# Altium PCB WalkMod.PcbDoc
Units mm, origin at the board's own origin, x right, y up, seen from the top; angles counter-clockwise.
Board outline 13 x 10 mm, 2 copper layers (Top Layer, Bottom Layer); 18 components, 12 nets, 33 pads, 0 vias.
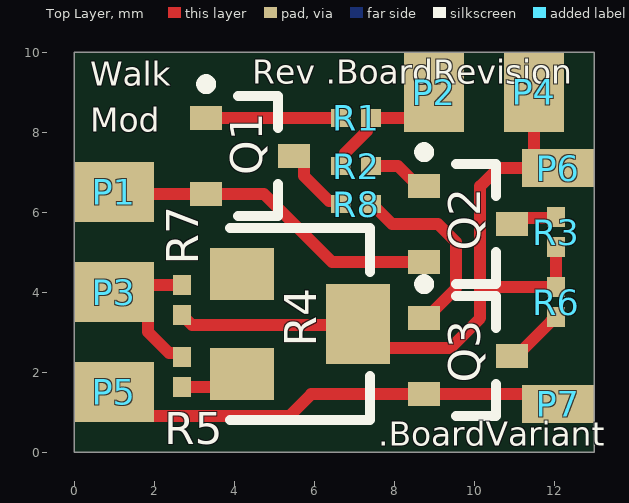
[diagram p0: Top Layer view]
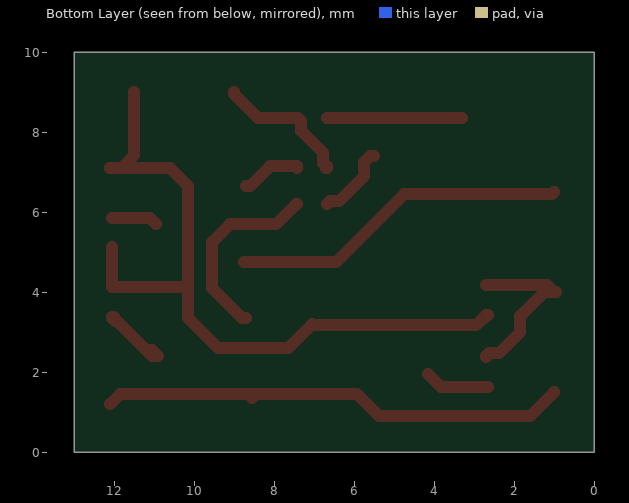
[diagram p1: Bottom Layer view, seen from below]

## Layer stack, top to bottom
Top Solder: solder mask 0.0102, Solder Resist, Dk 3.5
Top Layer: signal copper 0.0356
Dielectric 1: dielectric 0.32, FR-4, Dk 4.8
Bottom Layer: signal copper 0.0356
Bottom Solder: solder mask 0.0102, Solder Resist, Dk 3.5

## Board outline
0,0 0,10 13,10 13,0

## Design rules (kind name [scope] priority, off if disabled: settings)
BoardOutlineClearance [All] p1 off: gap=0.7 ignorepadtopadclearanceinfootprint=FALSE
Clearance [All] p1: gap=0.2 ignorepadtopadclearanceinfootprint=FALSE
Height [All] p1 off: minheight=0 maxheight=25.4 prefheight=12.7
HoleSize [All] p1: absolutevalues=TRUE maxlimit=0.3 minlimit=0.3 maxpercent=80.000 minpercent=20.000
HoleToHoleClearance [All] p1: gap=0.5 allowstackedmicrovias=TRUE
MinimumSolderMaskSliver [All] p1: minsoldermaskwidth=0.2
PolygonConnect [All] p1: connectstyle=Relief reliefconductorwidth=0.254 reliefentries=4 polygonreliefangle="90 Angle" airgapwidth=0.254
RoomDefinition WalkMod [InComponentClass('WalkMod')] p1 off: confinementstyle=ConfineIn formatcopy=TRUE lockcomponents=FALSE outline 0.3,10.8 1.4,10.8 1.4,11.9 0.3,11.9
RoutingVias [All] p1: holewidth=0.3 width=0.6 viastyle="Through Hole" minholewidth=0.3 minwidth=0.6 maxholewidth=0.3 maxwidth=0.6
SilkToSolderMaskClearance [IsPad] p1 off: minsilkscreentomaskgap=0.254 clearancetoexposedcopper=TRUE
SolderMaskExpansion [All] p1: expansion=0.102 istentingtop=FALSE
Width [All] p1: maxlimit=0.7 minlimit=0.3 preferedwidth=0.3
25 further rules are at their usual default settings.

## Components (designator, comment, footprint, x,y, rotation, side; value= is the part's Value field where it differs from the comment)
P1 "SMD Pad 1 pin" PAD_2X1.5_SQUARE 1,6.5 r180 top
P2 "SMD Pad 1 pin" PAD_2X1.5_SQUARE 9,9 r270 top
P3 "SMD Pad 1 pin" PAD_2X1.5_SQUARE 1,4 r180 top
P4 "SMD Pad 1 pin" PAD_2X1.5_SQUARE 11.5,9 r270 top
P5 "SMD Pad 1 pin" PAD_2X1.5_SQUARE 1,1.5 r0 top
P6 "SMD Pad 1 pin" PAD_1.8X0.95_SQUARE 12.1,7.1 r180 top
P7 "SMD Pad 1 pin" PAD_1.8X0.95_SQUARE 12.1,1.2 r180 top
Q1 "BC857B-TP" BC8xx_SOT23-3_C 4.4,7.4 r0 top
Q2 "BC857B-TP" BC8xx_SOT23-3_C 9.85,5.7 r0 top
Q3 "BC847B-TP" BC8xx_SOT23-3_C 9.85,2.4 r0 top
R1 "RT0402DRD0747KL" RT0402 7.05,8.35 r180 top value=47k
R2 "RT0402DRD0747KL" RT0402 7.05,7.15 r0 top value=47k
R3 "AT0402FRE0710KL" AT0402 12.05,5.5 r270 top value=10k
R4 "3214W-1-103E" BOURNS_3214W_C 5.65,3.2 r180 top value=10k
R5 "RT0402FRE074K7L" RT0402 2.7,2 r270 top value=4.7k
R6 "AT0402FRE0710KL" AT0402 12.05,3.75 r270 top value=10k
R7 "AT0402FRE0710KL" AT0402 2.7,3.8 r90 top value=10k
R8 "RT0402DRD0747KL" RT0402 7.05,6.2 r0 top value=47k

## Footprints (in the part's own frame and the unit in brackets; to place one, negate y for a bottom-side part, rotate by r counter-clockwise, add the part's x,y. Pads: shape width x height; smd on the part's side, far side on the other; paste and mask are expansions set on the pad)
AT0402 [mm] "Chip Resistor, 2-Leads, Body 1.00x0.50mm, IPC High Density"
  rect 0.5x0.45 smd mask+0.13: 1(-0.375,0) 2(0.375,0)
  body extent -0.53,-0.27 0.53,0.28, height 0.4
BC8xx_SOT23-3_C [mm] "SOT23, 3-Leads, Body 2.92x2.37mm, Pitch 0.95mm, IPC High Density"
  rect 0.8x0.6 smd: B(-1.1,0.95) C(1.1,0) E(-1.1,-0.95)
  silkscreen extent -1.22,-1.5 0.7,1.92, body extent -0.7,-1.52 0.7,1.52, height 1.1
BOURNS_3214W_C [mm]
  rect 1.6x1.3 smd: 1(1.45,-1.25) 3(1.45,1.25)
  rect 1.6x2 smd: 2(-1.45,0)
  silkscreen extent -1.75,-2.4 1.75,2.4, body extent -1.98,-2.41 1.98,2.42, height 5.29
PAD_1.8X0.95_SQUARE [mm]
  rect 1.8x0.95 smd paste-5: 1(0,0)
PAD_2X1.5_SQUARE [mm]
  rect 2x1.5 smd paste-5: 1(0,0)
RT0402 [mm] "Chip Resistor, 2-Leads, Body 1.00x0.50mm, IPC High Density"
  rect 0.5x0.45 smd mask+0.13: 1(-0.375,0) 2(0.375,0)
  body extent -0.53,-0.27 0.53,0.28, height 0.4

## Part data
P1 P2 P3 P4 P5 P6 P7: "Single SMD Pad"
  P1: Name=3.3V
  P2: Name=Button
  P3: Name="X Axis In"
  P4: Name="X Axis Out"
  P5: Name=GND
  P6: Name=Snapback+
  P7: Name=Snapback-
Q1 Q2: "Bipolar (BJT) Transistor PNP 45 V 100 mA 200MHz 310 mW Surface Mount SOT-23", Type=BC857B-TP
Q3: "Bipolar (BJT) Transistor NPN 45 V 100 mA 100MHz 225 mW Surface Mount SOT-23", Type=BC847B-TP
R1 R2 R8: "47 kOhms ±0.5% 0.063W, 1/16W Chip Resistor 0402 (1005 Metric) - Thin Film", Value2=62.5mW, Type=RT0402DRD0747KL
R3 R6 R7: "10 kOhms ±1% 0.063W, 1/16W Chip Resistor 0402 (1005 Metric) Anti-Sulfur, Automotive AEC-Q200, Moisture Resistant Thin Film", Value2=62.5mW, Type=AT0402FRE0710KL
R4: "10 kOhms 0.25W, 1/4W J Lead Surface Mount Trimmer Potentiometer Cermet 5.0 Turn Top Adjustment", Value2=250mW, Type=3214W-1-103E
R5: "4.7 kOhms ±1% 0.063W, 1/16W Chip Resistor 0402 (1005 Metric) - Thin Film", Value2=62.5mW, Type=RT0402FRE074K7L

## Nets (pads, with @x,y where several pads share a name; then routed paths per layer and width w, separated by ;. In a path a pad name is that pad's centre, name@x,y a point inside that pad or via, vN(x,y) a via of type N, cw(c..) or ccw(c..) an arc to the next point about the centre after c; other vN are vias at no path point)
+3.3V: P1.1 Q1.E Q2.E | length 8.5
  Top Layer w0.3: P1.1 1.05,6.45 Q1.E 4.75,6.45 6.45,4.75 Q2.E
BTN: P2.1 R1.1 R2.1 | length 3.5
  Top Layer w0.3: R2.1@6.675,7.1 6.7,7.1 R2.1@6.712,7.113 ; R2.1 6.7,7.15 6.775,7.225 6.775,7.48 7.325,8.03 7.325,8.275 7.4,8.35 R1.1 8.4,8.35 9,8.95 P2.1
GND: P5.1 P7.1 Q3.E | length 11.8
  Top Layer w0.3: P5.1 1.6,0.9 5.375,0.9 5.925,1.45 Q3.E@8.45,1.45 ; Q3.E@8.55,1.35 Q3.E@8.45,1.45 ; P7.1 11.85,1.45 Q3.E Q3.E@8.45,1.45
NetQ1_B: Q1.B R1.2 | length 3.4
  Top Layer w0.3: Q1.B R1.2
NetQ1_C: Q1.C R8.1 | length 1.9
  Top Layer w0.3: Q1.C 5.6,7.4 5.75,7.25 5.75,6.9 6.375,6.275 6.6,6.275 R8.1
NetQ2_B: Q2.B R2.2 | length 1.5
  Top Layer w0.3: R2.2 8.1,7.15 8.6,6.65 Q2.B@8.7,6.65
NetQ2_C: Q2.C R3.1 | length 1.2
  Top Layer w0.3: Q2.C 11.1,5.85 11.376,5.85 R3.1@12.05,5.85
NetQ3_B: Q3.B R8.2 | length 4.8
  Top Layer w0.3: R8.2 7.45,6.2 7.95,5.7 9.1,5.7 9.55,5.25 9.55,4.1 8.8,3.35 Q3.B@8.7,3.35
NetQ3_C: Q3.C R6.2 | length 3
  Top Layer w0.3: Q3.C@10.9,2.4 11.05,2.55 11.2,2.55 12,3.35 R6.2@12,3.375 ; Q3.C 11.05,2.4 11.925,3.275 11.975,3.275 12.05,3.35 R6.2
NetR4_3: R4.3 R5.2 | length 1.6
  Top Layer w0.3: R5.2@2.65,1.625 R5.2 3.825,1.625 R4.3@4.15,1.95
XIN: P3.1 R5.1 R7.2 | length 4.4
  Top Layer w0.3: P3.1@0.95,4 P3.1 ; R5.1 2.7,2.4 2.625,2.475 2.375,2.475 1.85,3 1.85,3.4 1.25,4 P3.1 ; R7.2 1.175,4.175 P3.1
XOUT: P4.1 P6.1 R3.2 R4.2 R6.1 R7.1 | length 18.5
  Top Layer w0.3: R7.1@2.65,3.425 R7.1 2.7,3.4 2.775,3.325 2.8,3.325 2.95,3.175 R4.2@7.025,3.175 ; R4.2@7.05,3.2 7.65,2.6 9.4,2.6 10.15,3.35 10.15,4.15 ; P4.1 11.5,7.425 P6.1@11.825,7.1 ; R3.2 R6.1 10.175,4.125 10.15,4.15 ; P6.1 P6.1@11.825,7.1 ; 10.15,4.15 10.15,6.65 10.6,7.1 P6.1@11.825,7.1
pads on no net: R4.1

## Silkscreen, mask and mechanical layers (free items; w line width, h text height)
Top Overlay:
  text "Rev .BoardRevision" at 4.454,9.204 h0.6
  text "Walk" at 0.404,9.154 h0.6
  text "Mod" at 0.404,8.004 h0.6
  text ".BoardVariant" at 7.604,0.154 h0.6
Board Shape:
  the board outline again, w0.2
Margin:
  lines w0.2: 0.7,0.7 0.7,9.3 12.3,9.3 12.3,0.7 0.7,0.7

## Dimensions
13,0 to 13,10 on Dimensions
0,0 to 13,0 on Dimensions